# Altium PCB UFQFPN-20_L3.0-W3.0-P0.50-TL.pcbdoc
Units mm, origin at the board's own origin, x right, y up, seen from the top; angles counter-clockwise.
Board outline 16.95 x 16.58 mm, 2 copper layers (Top Layer, Bottom Layer); 1 components, 0 nets, 20 pads, 0 vias.
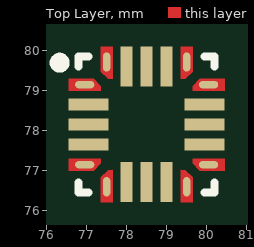
[diagram p0: Top Layer view]
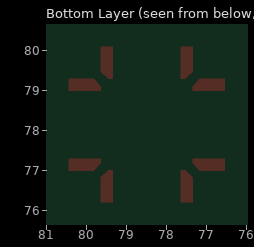
[diagram p1: Bottom Layer view, seen from below]

## Layer stack, top to bottom
Top Layer: signal copper (thickness not stored)
Dielectric: dielectric 0.32, FR-4, Dk 4.8
Bottom Layer: signal copper (thickness not stored)

## Board outline
86.8,69.85 69.85,69.85 69.85,86.435 86.8,86.435

## Design rules (kind name [scope] priority, off if disabled: settings)
BoardOutlineClearance safeClearance [All] p0: genericclearance=0.254 ignorepadtopadclearanceinfootprint=FALSE except(0: Arc-SplitContinuation Track-SplitContinuation SMDPad-SplitContinuation THPad-SplitContinuation Via-SplitContinuation Fill-SplitContinuation Poly-SplitContinuation Region-SplitContinuation Text-SplitContinuation; 0.152: Track-CutoutEdge SMDPad-CutoutEdge THPad-CutoutEdge Via-CutoutEdge Fill-CutoutEdge Region-CutoutEdge; 0.3: Track-OutlineEdge SMDPad-OutlineEdge THPad-OutlineEdge Via-OutlineEdge Fill-OutlineEdge Region-OutlineEdge Poly-OutlineEdge Text-OutlineEdge)
Clearance safeClearance [All] p1: gap=0.178 ignorepadtopadclearanceinfootprint=FALSE except(0.152: Track-Track Track-SMDPad SMDPad-SMDPad Track-THPad SMDPad-THPad THPad-THPad Track-Via SMDPad-Via THPad-Via Via-Via Track-Fill SMDPad-Fill THPad-Fill Via-Fill Fill-Fill Track-Region SMDPad-Region THPad-Region Via-Region Fill-Region Region-Region Track-Poly SMDPad-Poly THPad-Poly Via-Poly Fill-Poly Region-Poly Poly-Poly Track-Text SMDPad-Text THPad-Text Via-Text Fill-Text Region-Text Poly-Text Text-Text; 0.175: Track-Hole SMDPad-Hole THPad-Hole Via-Hole Fill-Hole Region-Hole Poly-Hole Text-Hole Sheet-Hole; 0.3: Track-Sheet SMDPad-Sheet THPad-Sheet Via-Sheet Fill-Sheet Region-Sheet Poly-Sheet Text-Sheet)
DiffPairsRouting differentialPair [All] p1: maxuncoupledlength=10 minlimit=6 maxlimit=6 mostfreqgap=6 toplayer_minwidth=5 toplayer_prefwidth=10 toplayer_maxwidth=100 bottomlayer_minwidth=5 bottomlayer_prefwidth=10 bottomlayer_maxwidth=100
PasteMaskExpansion pasteMaskExpansion [All] p1: expansion=0
PlaneConnect innerPlane [All] p1: planeconnectstyle=Relief reliefexpansion=0.508 reliefentries=4 reliefconductorwidth=0.254 reliefairgap=0.254
PolygonConnect copperRegion [All] p1: connectstyle=Relief reliefentries=4 reliefconductorwidth=10 polygonreliefangle="90 Angle" airgapwidth=10
RoutingVias viaSize [All] p1: viastyle="Through Hole" holewidth=12.0078 minholewidth=11.811 maxholewidth=236.2204 width=24.0158 minwidth=19.685 maxwidth=393.7008
SolderMaskExpansion solderMaskExpansion [All] p1: useseparateexpansions=TRUE expansion=2 expansionbottom=2
Width trackWidth [All] p1: maxlimit=100 minlimit=5 preferedwidth=10

## Components (designator, comment, footprint, x,y, rotation, side; value= is the part's Value field where it differs from the comment)
? "UFQFPN-20_L3.0-W3.0-P0.50-TL" UFQFPN-20_L3.0-W3.0-P0.50-TL 78.5,78.142 r0 top

## Footprints (in the part's own frame and the unit in brackets; to place one, negate y for a bottom-side part, rotate by r counter-clockwise, add the part's x,y. Pads: shape width x height; smd on the part's side, far side on the other; paste and mask are expansions set on the pad)
UFQFPN-20_L3.0-W3.0-P0.50-TL [mm]
  oval 0.482x0.181 smd: 1(-1.549,0.992) 5(-1.549,-1.008) 11(1.549,-1.008) 15(1.549,0.993)
  rect 1x0.3 smd: 2(-1.45,0.492) 3(-1.45,-0.008) 4(-1.45,-0.508) 12(1.45,-0.508) 13(1.45,-0.008) 14(1.45,0.492)
  oval 0.181x0.482 smd: 6(-1,-1.559) 10(1.001,-1.559) 16(1.001,1.559) 20(-1,1.559)
  rect 0.3x1 smd: 7(-0.5,-1.442) 8(0,-1.442) 9(0.5,-1.442) 17(0.5,1.442) 18(0,1.442) 19(-0.5,1.442)
  Top Layer region: -1.151,1.942 -0.849,1.942 -0.85,1.14 -0.964,1.142 -1.151,1.32
  Top Layer region: -1.95,1.143 -1.328,1.143 -1.149,0.956 -1.147,0.842 -1.95,0.841
  Top Layer region: 1.152,1.942 1.152,1.32 0.964,1.142 0.851,1.14 0.849,1.942
  Top Layer region: 1.95,1.143 1.95,0.841 1.147,0.843 1.149,0.956 1.328,1.143
  Top Layer region: 1.95,-1.159 1.328,-1.159 1.149,-0.972 1.147,-0.858 1.95,-0.857
  Top Layer region: 1.152,-1.942 0.85,-1.942 0.851,-1.14 0.964,-1.142 1.152,-1.32
  Top Layer region: -1.151,-1.942 -1.151,-1.32 -0.964,-1.142 -0.85,-1.14 -0.849,-1.942
  Top Layer region: -1.95,-1.159 -1.95,-0.857 -1.147,-0.858 -1.149,-0.972 -1.328,-1.159
  silkscreen extent -2.3,-1.71 1.7,1.69

## Nets (pads, with @x,y where several pads share a name; then routed paths per layer and width w, separated by ;. In a path a pad name is that pad's centre, name@x,y a point inside that pad or via, vN(x,y) a via of type N, cw(c..) or ccw(c..) an arc to the next point about the centre after c; other vN are vias at no path point)
pads on no net: ?.1 ?.2 ?.3 ?.4 ?.5 ?.6 ?.7 ?.8 ?.9 ?.10 ?.11 ?.12 ?.13 ?.14 ?.15 ?.16 ?.17 ?.18 ?.19 ?.20